# EAGLE board AT-MT9P (EAGLE 9.2.2)

Size 38 x 34 mm. Coordinates in mm from the lower left corner, seen from the top.
Outline: 0,34 0,0 38,0 38,34 0,34
Copper layers (1*16): Top 0.035mm / dielectric 1.5mm / Bottom 0.035mm
Design rules "default": minimum track width 6mil, minimum drill 0.35mm, track to track 6mil, track to pad 6mil, pad to pad 6mil, via to via 6mil, smd to smd 6mil, copper to edge 40mil, drill to drill 6mil, minimum pad ring 10mil, minimum via ring 8mil, stop-mask expansion 4mil, vias tented up to drill 0mil, thermal gap 10mil
Holes 3.2 mm at 35,31 35,3 3,3 3,31

## Footprints (pad centres in the part's own frame; a part is rotated, then mirrored left to right if it is on the bottom)
NOVAL_SOCKET = drill 2 pad 3.5: P$1 6.47,8.9; P$2 0,11; P$3 -6.47,8.9; P$4 -10.5,3.4; P$5 -11,-3.4; P$6 -6.47,-8.9; P$7 0,-11; P$8 6.47,-8.9; P$9 10.5,-3.4
1X09 = drill 1.016 long: 1 -10.16,0; 2 -7.62,0; 3 -5.08,0; 4 -2.54,0; 5 0,0; 6 2.54,0; 7 5.08,0; 8 7.62,0; 9 10.16,0

## Placement (x,y rotation side)
E$1  [NOVAL_SOCKET]  19,17 0 top
E$2  [1X09]  19,31 0 bottom
E$3  [1X09]  19,3 0 bottom

## Library data of the parts
E$1 = VacuumTube
E$2 E$3 = pinhead

## Tracks (layer width: path | path; a pad name or v marks a point on that pad's centre or on a via)
(copper drawn outside any net)
  shapes: Top area x6